# Altium PCB Joystick.PcbDoc
Units mm, origin at the board's own origin, x right, y up, seen from the top; angles counter-clockwise.
Board outline 315.73 x 101.6 mm, 2 copper layers (Top Layer, Bottom Layer); 88 components, 64 nets, 385 pads, 135 vias.
Unrouted connection lines stored in the file: 2.
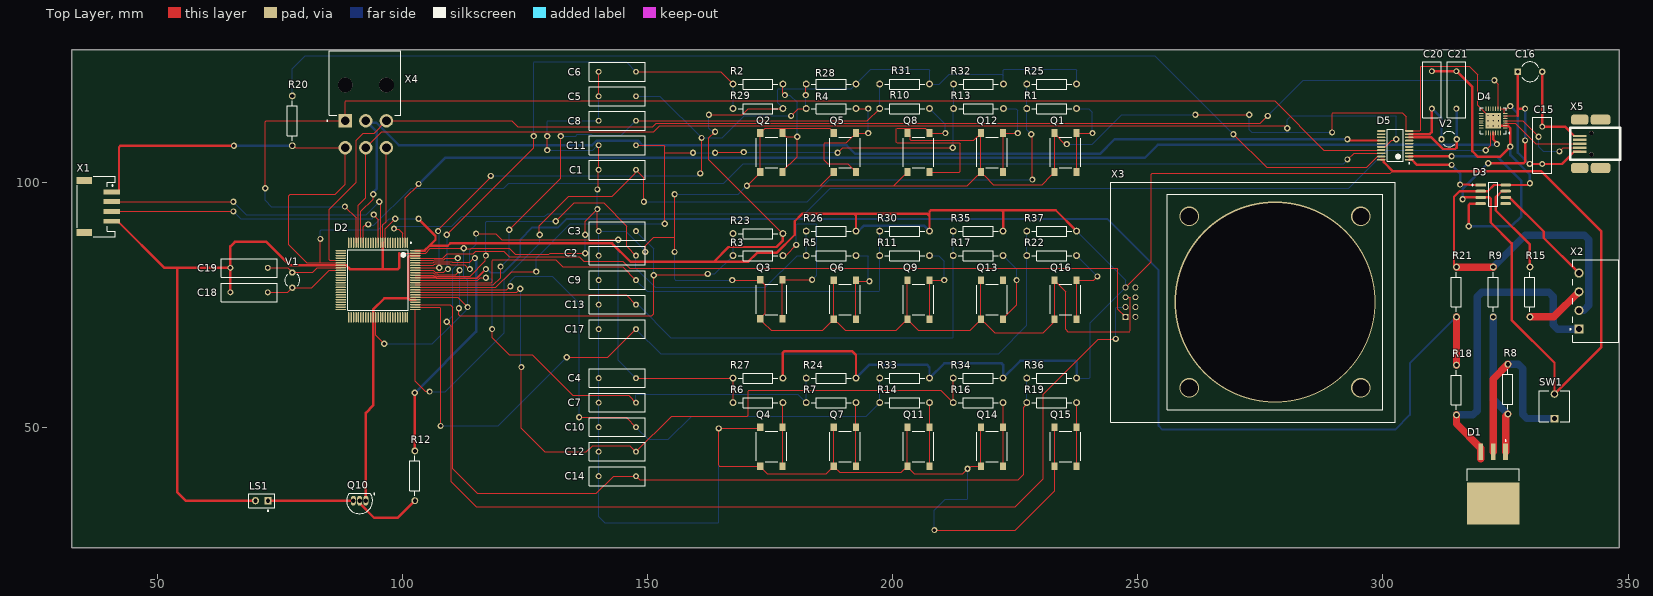
[diagram p0: Top Layer view]
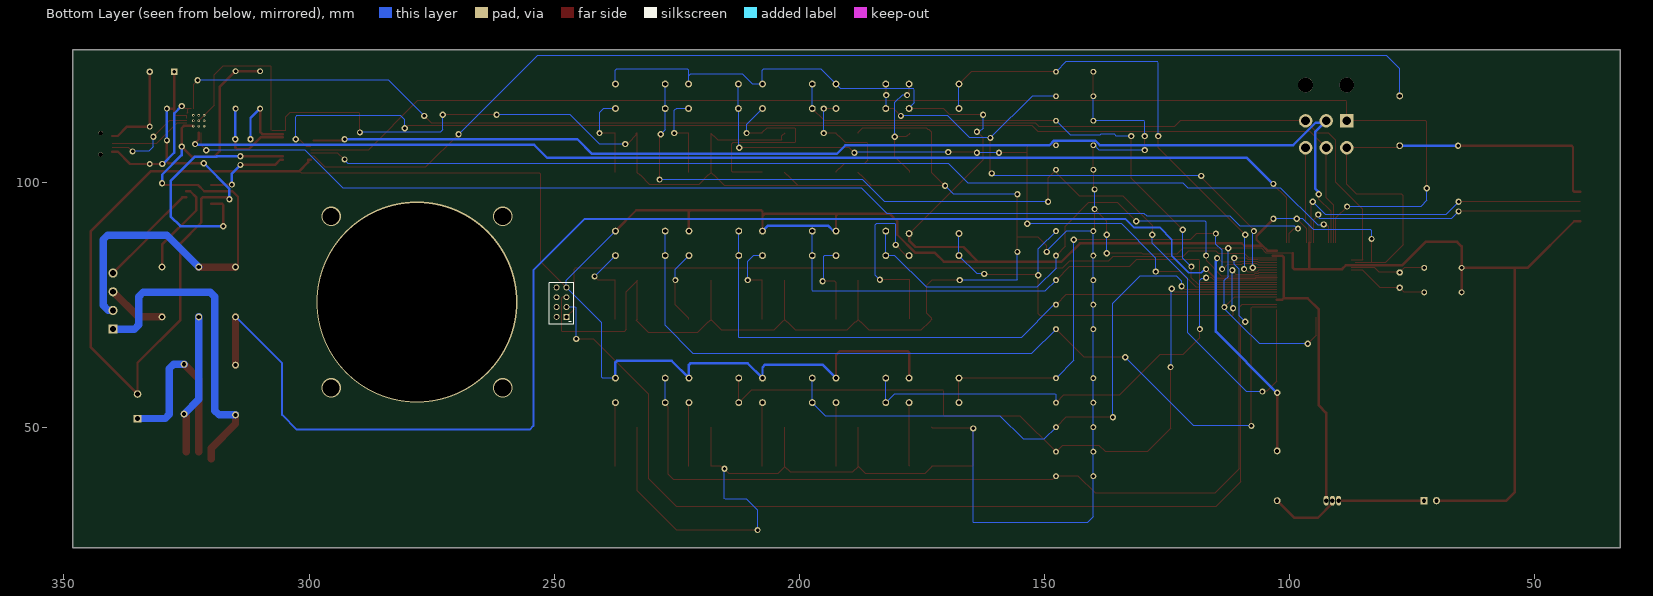
[diagram p1: Bottom Layer view, seen from below]

## Layer stack, top to bottom
Top Solder: solder mask 0.0102, Solder Resist, Dk 3.5
Top Layer: signal copper 0.0356
Dielectric 1: dielectric 0.32, FR-4, Dk 4.8
Bottom Layer: signal copper 0.0356
Bottom Solder: solder mask 0.0102, Solder Resist, Dk 3.5

## Board outline
32.5,25.4 348.234,25.4 348.234,127 32.5,127

## Design rules (kind name [scope] priority, off if disabled: settings)
Clearance [All] p1: gap=0.254 ignorepadtopadclearanceinfootprint=FALSE except(0: Arc-Hole Track-Hole SMDPad-Hole THPad-Hole Via-Hole Fill-Hole Poly-Hole Region-Hole Text-Hole; 0.1: Arc-Arc Arc-Track Arc-SMDPad Arc-THPad Arc-Via Track-Track Track-SMDPad Track-THPad Track-Via SMDPad-SMDPad SMDPad-THPad SMDPad-Via)
PolygonConnect [All] p1: connectstyle=Relief reliefconductorwidth=0.254 reliefentries=4 polygonreliefangle="90 Angle" airgapwidth=0.254
RoutingVias [All] p1: holewidth=0.711 width=1.27 viastyle="Through Hole" minholewidth=0.711 minwidth=1.27 maxholewidth=0.711 maxwidth=1.27
SolderMaskExpansion [All] p1: expansion=0.102 istentingtop=FALSE
Width [All] p1: maxlimit=1.6 minlimit=0.1 preferedwidth=0.254 minimp=50.000000 maximp=50.000000 favimp=50.000000
30 further rules are at their usual default settings.

## Components (designator, comment, footprint, x,y, rotation, side; value= is the part's Value field where it differs from the comment)
C1 "Cap" RAD-0.3 143.81,102.5 r0 top value=100uF
C2 "Cap" RAD-0.3 143.81,85 r0 top value=100uF
C3 "Cap" RAD-0.3 143.81,90 r0 top value=100uF
C4 "Cap" RAD-0.3 143.81,60 r0 top value=100uF
C5 "Cap" RAD-0.3 143.81,117.5 r0 top value=100uF
C6 "Cap" RAD-0.3 143.81,122.5 r0 top value=100uF
C7 "Cap" RAD-0.3 143.81,55 r0 top value=100uF
C8 "Cap" RAD-0.3 143.81,112.5 r0 top value=100uF
C9 "Cap" RAD-0.3 143.81,80 r180 top value=100uF
C10 "Cap" RAD-0.3 143.81,50 r180 top value=100uF
C11 "Cap" RAD-0.3 143.81,107.5 r0 top value=100uF
C12 "Cap" RAD-0.3 143.81,45 r0 top value=100uF
C13 "Cap" RAD-0.3 143.81,75 r0 top value=100uF
C14 "Cap" RAD-0.3 143.81,40 r0 top value=100uF
C15 "Cap" RAD-0.3 332.5,107.5 r90 top value=1uF
C16 "Cap2" CAPR5-4X5 330,122.5 r0 top value=4.7uF
C17 "Cap" RAD-0.3 143.81,70 r0 top value=100uF
C18 "Cap" RAD-0.3 68.69,77.5 r180 top value=22pF
C19 "Cap" RAD-0.3 68.69,82.5 r0 top value=22pF
C20 "Cap" RAD-0.3 310,118.81 r270 top value=22pF
C21 "Cap" RAD-0.3 315,118.81 r270 top value=22pF
D1 "TL783CKTTR" FP-KTT0003A-MFG 322.5,36.697 r180 top
D2 "ATmega640-16AU" 100A_M 95,80 r270 top
D3 "TJA1050T/CM,118" FP-SOT96-1-IPC_A 322.5,97.5 r0 top
D4 "CP2103-GM" SLAB-QFN-28-3125x3125TP_A_M 322.5,112.5 r180 top
D5 "MCP2515-I/ST" TSSOP-ST20_N 302.5,107.5 r180 top
LS1 "Speaker" PIN2 72.54,35 r180 top
Q1 "430152043836" WS-TASV_L6W6H4.3_4301x20438x6 235.25,106.025 r90 top
Q2 "430152043836" WS-TASV_L6W6H4.3_4301x20438x6 175.25,106.025 r90 top
Q3 "430152043836" WS-TASV_L6W6H4.3_4301x20438x6 175.25,76.073 r90 top
Q4 "430152043836" WS-TASV_L6W6H4.3_4301x20438x6 175.25,46.025 r90 top
Q5 "430152043836" WS-TASV_L6W6H4.3_4301x20438x6 190.25,106.025 r90 top
Q6 "430152043836" WS-TASV_L6W6H4.3_4301x20438x6 190.25,76.025 r90 top
Q7 "430152043836" WS-TASV_L6W6H4.3_4301x20438x6 190.25,46.025 r90 top
Q8 "430152043836" WS-TASV_L6W6H4.3_4301x20438x6 205.25,106.025 r90 top
Q9 "430152043836" WS-TASV_L6W6H4.3_4301x20438x6 205.25,76.025 r90 top
Q10 "NPN" TO-226-AA 91.23,35 r90 top
Q11 "430152043836" WS-TASV_L6W6H4.3_4301x20438x6 205.25,46.025 r90 top
Q12 "430152043836" WS-TASV_L6W6H4.3_4301x20438x6 220.25,106.025 r90 top
Q13 "430152043836" WS-TASV_L6W6H4.3_4301x20438x6 220.25,76.025 r90 top
Q14 "430152043836" WS-TASV_L6W6H4.3_4301x20438x6 220.25,46.025 r90 top
Q15 "430152043836" WS-TASV_L6W6H4.3_4301x20438x6 235.25,46.025 r90 top
Q16 "430152043836" WS-TASV_L6W6H4.3_4301x20438x6 235.25,76.025 r90 top
R1 "Res2" AXIAL-0.4 232.42,115 r180 top value=5K
R2 "Res2" AXIAL-0.4 172.5,120 r180 top value=5K
R3 "Res2" AXIAL-0.4 172.5,85 r180 top value=5K
R4 "Res2" AXIAL-0.4 187.42,115 r180 top value=5K
R5 "Res2" AXIAL-0.4 187.42,85 r180 top value=5K
R6 "Res2" AXIAL-0.4 172.5,55 r180 top value=5K
R7 "Res2" AXIAL-0.4 187.42,55 r180 top value=5K
R8 "Res2" AXIAL-0.4 325.5,57.75 r270 top value=75
R9 "Res2" AXIAL-0.4 322.5,77.58 r90 top value=220
R10 "Res2" AXIAL-0.4 202.42,115 r180 top value=5K
R11 "Res2" AXIAL-0.4 202.42,85 r180 top value=5K
R12 "Res2" AXIAL-0.4 102.5,40.08 r270 top value=10K
R13 "Res2" AXIAL-0.4 217.5,115 r0 top value=5K
R14 "Res2" AXIAL-0.4 202.42,55 r0 top value=5K
R15 "Res2" AXIAL-0.4 330,77.58 r270 top value=120
R16 "Res2" AXIAL-0.4 217.42,55 r180 top value=5K
R17 "Res2" AXIAL-0.4 217.42,85 r180 top value=5K
R18 "Res2" AXIAL-0.4 315,57.58 r270 top value=10K
R19 "Res2" AXIAL-0.4 232.42,55 r0 top value=5K
R20 "Res2" AXIAL-0.4 77.5,112.5 r90 top value=10K
R21 "Res2" AXIAL-0.4 315,77.58 r270 top value=1K
R22 "Res2" AXIAL-0.4 232.42,85 r0 top value=5K
R23 "Res2" AXIAL-0.4 172.5,89.5 r180 top value=5K
R24 "Res2" AXIAL-0.4 187.42,60 r180 top value=5K
R25 "Res2" AXIAL-0.4 232.42,120 r180 top value=5K
R26 "Res2" AXIAL-0.4 187.42,90 r180 top value=5K
R27 "Res2" AXIAL-0.4 172.5,60 r180 top value=5K
R28 "Res2" AXIAL-0.4 187.42,120 r180 top value=5K
R29 "Res2" AXIAL-0.4 172.5,115 r180 top value=5K
R30 "Res2" AXIAL-0.4 202.42,90 r180 top value=5K
R31 "Res2" AXIAL-0.4 202.42,120 r180 top value=5K
R32 "Res2" AXIAL-0.4 217.5,120 r0 top value=5K
R33 "Res2" AXIAL-0.4 202.42,60 r0 top value=5K
R34 "Res2" AXIAL-0.4 217.42,60 r180 top value=5K
R35 "Res2" AXIAL-0.4 217.42,90 r180 top value=5K
R36 "Res2" AXIAL-0.4 232.42,60 r0 top value=5K
R37 "Res2" AXIAL-0.4 232.42,90 r0 top value=5K
SW1 "EVQ-22707K" FP-EVQ-22707K-MFG 335,54.25 r90 top
V1 "XTAL" R38 77.5,80 r180 top
V2 "XTAL" R38 313.5,108.75 r90 top
X1 "620104131822" 620104131822 37.5,95 r270 top
X2 "1803293" FP-1803293-MFG 343.4,75.715 r90 top
X3 "MLX90333_JoysticPlate" MLX90333_Joy 278,75.5 r180 top
X4 "39-30-1061" FP-39-30-1061-MFG 92.5,120 r180 top
X5 "67503-1020" MOLX-67503-1020_V 340.175,106.2 r180 top

## Footprints (in the part's own frame and the unit in brackets; to place one, negate y for a bottom-side part, rotate by r counter-clockwise, add the part's x,y. Pads: shape width x height; smd on the part's side, far side on the other; paste and mask are expansions set on the pad)
100A_M [mm] "Thin QFP, 100-Leads, Body 14x14mm, Pitch 0.5mm, IPC Low Density"
  oval 2.1x0.3 smd: 1(-7.6,6) 2(-7.6,5.5) 3(-7.6,5) 4(-7.6,4.5) 5(-7.6,4) 6(-7.6,3.5) 7(-7.6,3) 8(-7.6,2.5) 9(-7.6,2) 10(-7.6,1.5) 11(-7.6,1) 12(-7.6,0.5) 13(-7.6,0) 14(-7.6,-0.5) 15(-7.6,-1) 16(-7.6,-1.5) 17(-7.6,-2) 18(-7.6,-2.5) 19(-7.6,-3) 20(-7.6,-3.5) 21(-7.6,-4) 22(-7.6,-4.5) 23(-7.6,-5) 24(-7.6,-5.5) 25(-7.6,-6) 51(7.6,-6) 52(7.6,-5.5) 53(7.6,-5) 54(7.6,-4.5) 55(7.6,-4) 56(7.6,-3.5) 57(7.6,-3) 58(7.6,-2.5) 59(7.6,-2) 60(7.6,-1.5) 61(7.6,-1) 62(7.6,-0.5) 63(7.6,0) 64(7.6,0.5) 65(7.6,1) 66(7.6,1.5) 67(7.6,2) 68(7.6,2.5) 69(7.6,3) 70(7.6,3.5) 71(7.6,4) 72(7.6,4.5) 73(7.6,5) 74(7.6,5.5) 75(7.6,6)
  oval 0.3x2.1 smd: 26(-6,-7.6) 27(-5.5,-7.6) 28(-5,-7.6) 29(-4.5,-7.6) 30(-4,-7.6) 31(-3.5,-7.6) 32(-3,-7.6) 33(-2.5,-7.6) 34(-2,-7.6) 35(-1.5,-7.6) 36(-1,-7.6) 37(-0.5,-7.6) 38(0,-7.6) 39(0.5,-7.6) 40(1,-7.6) 41(1.5,-7.6) 42(2,-7.6) 43(2.5,-7.6) 44(3,-7.6) 45(3.5,-7.6) 46(4,-7.6) 47(4.5,-7.6) 48(5,-7.6) 49(5.5,-7.6) 50(6,-7.6) 76(6,7.6) 77(5.5,7.6) 78(5,7.6) 79(4.5,7.6) 80(4,7.6) 81(3.5,7.6) 82(3,7.6) 83(2.5,7.6) 84(2,7.6) 85(1.5,7.6) 86(1,7.6) 87(0.5,7.6) 88(0,7.6) 89(-0.5,7.6) 90(-1,7.6) 91(-1.5,7.6) 92(-2,7.6) 93(-2.5,7.6) 94(-3,7.6) 95(-3.5,7.6) 96(-4,7.6) 97(-4.5,7.6) 98(-5,7.6) 99(-5.5,7.6) 100(-6,7.6)
  silkscreen extent -7.72,-6.15 6.15,6.83, body extent -7,-7 7,7, height 1.6
620104131822 [mm] "2.00mm SMT Male Horizontal Shrouded Header, 4p"
  rect 1x3.4 smd: 1(-3,3.2) 2(-1,3.2) 3(1,3.2) 4(3,3.2)
  rect 1.4x3.1 smd: MP1(-5.3,-2.45) MP2(5.3,-2.45)
  silkscreen extent -6.15,-3.9 6.15,3.9, body extent -6,-3.8 6,4.8, height 5.57
AXIAL-0.4 [mm] "Axial Device, Thru-Hole; 2 Leads; 0.4 in Pin Spacing"
  round 1.4 hole 0.85: 1(-5.08,0) 2(5.08,0)
  silkscreen extent -4.06,-1.02 4.06,1.02
CAPR5-4X5 [mm] "Capacitor; 2 Leads"
  rect 1.35x1.35 hole 0.8: 1(-2.5,0)
  round 1.35 hole 0.8: 2(2.5,0)
  silkscreen extent -1.69,-2 1.82,2
FP-39-30-1061-MFG [mm]
  rect 2.75x2.75 hole 1.8 paste-1000 mask+0: 1(4.2,7.5)
  round 2.75 hole 1.8 paste-1000 mask+0: 2(0,7.5) 3(-4.2,7.5) 4(4.2,13) 5(0,13) 6(-4.2,13)
  round 3 hole 3 unplated paste-1000 mask+0: ""(-4.2,0.2) ""(4.2,0.2)
  silkscreen extent -7.09,-6.78 7.99,7.62, body extent -7.19,-6.88 7.59,14.48, height 0.25
FP-1803293-MFG [mm]
  rect 1.85x1.85 hole 1.2 paste-1000 mask+0: 1(-5.715,3.4)
  round 1.85 hole 1.2 paste-1000 mask+0: 2(-1.905,3.4) 3(1.905,3.4) 4(5.715,3.4)
  silkscreen extent -8.39,-4.67 8.39,5.27, body extent -8.49,-4.77 8.49,4.77, height 0.25
FP-EVQ-22707K-MFG [mm]
  rect 1.55x1.55 hole 1 paste-1000 mask+0: A(-2.5,0)
  round 1.55 hole 1 paste-1000 mask+0: B(2.5,0)
  silkscreen extent -3.15,-3.15 3.15,3.15, body extent -3.37,-3.25 3.37,3.25, height 0.25
FP-KTT0003A-MFG [mm]
  rect 1x3.4 smd paste-1000 mask+0: 1(-2.54,-8.303) 2(0,-8.303) 3(2.54,-8.303)
  rect 10.7x8.6 smd paste-1000 mask+0: 4(0,2.298)
  silkscreen extent -5.34,-10.69 5.34,-2.38, body extent -5.45,-10.1 5.45,6.7, height 0.25
FP-SOT96-1-IPC_A [mm]
  rect 2.204x0.608 smd paste+0 mask+0: 1(-2.551,1.905)
  rrect100% 2.204x0.608 smd paste+0 mask+0: 2(-2.551,0.635) 3(-2.551,-0.635) 4(-2.551,-1.905) 5(2.551,-1.905) 6(2.551,-0.635) 7(2.551,0.635) 8(2.551,1.905)
  silkscreen extent -4.33,-2.45 0.95,2.45, body extent -4.15,-2.95 4.15,2.95, height 0.25
MLX90333_Joy [mm]
  rect 1.2x1.2 hole 0.8: 1(30.5,3)
  round 1.2 hole 0.8: 2(28.5,3) 3(30.5,1) 4(28.5,1) 5(30.5,-1) 6(28.5,-1) 7(30.5,-3) 8(28.5,-3)
  silkscreen extent -24.5,-24.5 33.5,24.5
MOLX-67503-1020_V [mm] "Mini USB Connector, SMT, Righer Angle"
  rrect50% 2.8x0.5 smd: 1(0,0) 2(0,-0.8) 3(0,-1.6) 4(0,-2.4) 5(0,-3.2)
  rrect50% 3.5x2.05 smd: 6(0.025,3.325) 8(0.025,-6.525)
  rrect50% 4x2.05 smd: 7(-4.225,3.325) 9(-4.225,-6.525)
  round 0.9 hole 0.9 unplated: X(-2.325,-3.8) Y(-2.325,0.6)
  silkscreen extent -8.25,-4.85 2,1.65, body extent -8.22,-6.56 0.78,3.34, height 3.95
PIN2 [mm] "Photosensitive Diode; 2 Leads"
  rect 1.5x1.5 hole 0.9: 1(0,0)
  round 1.5 hole 0.9: 2(2.54,0)
  silkscreen extent -1.4,-1.4 3.94,2.17
R38 [mm] "Crystal, Thru-Hole; 2 Leads; Body 3.1 x 8.2 mm (Dia.xH)"
  round 1.3 hole 0.7: 1(0,1.55) 2(0,-1.55)
  silkscreen extent -1.55,-1.19 1.55,1.17
RAD-0.3 [mm] "Radial Cap, Thru-Hole; 2 Leads; 0.3 in Pin Spacing"
  round 1.2 hole 0.7: 1(-3.81,0) 2(3.81,0)
  silkscreen extent -5.71,-1.91 5.71,1.91
SLAB-QFN-28-3125x3125TP_A_M [mm] "QFN, 28-Leads, Body 5x5mm, Pitch 0.5mm, Thermal Pad 3.13x3.13mm, IPC Low Density"
  oval 0.95x0.2 smd: 1(-2.475,1.5) 2(-2.475,1) 3(-2.475,0.5) 4(-2.475,0) 5(-2.475,-0.5) 6(-2.475,-1) 7(-2.475,-1.5) 15(2.475,-1.5) 16(2.475,-1) 17(2.475,-0.5) 18(2.475,0) 19(2.475,0.5) 20(2.475,1) 21(2.475,1.5)
  oval 0.2x0.95 smd: 8(-1.5,-2.475) 9(-1,-2.475) 10(-0.5,-2.475) 11(0,-2.475) 12(0.5,-2.475) 13(1,-2.475) 14(1.5,-2.475) 22(1.5,2.475) 23(1,2.475) 24(0.5,2.475) 25(0,2.475) 26(-0.5,2.475) 27(-1,2.475) 28(-1.5,2.475)
  rect 3.13x3.13 smd: 29(0,0)
  silkscreen extent -3.42,-2.65 2.65,2.65, body extent -2.5,-2.5 2.5,2.5, height 1
TO-226-AA [mm] "TO, Flat Index; 3 In-Line, Axial Leads; Body Dia. 4.8mm; Leads 0.55 x 0.51 mm (max)"
  oval 2x1 hole 0.9: 1(0,-1.27) 2(0,0) 3(0,1.27)
  silkscreen extent -2.65,-3.13 1.52,2.65, body extent -2.65,-2.66 1.52,2.66, height 5.33
TSSOP-ST20_N [mm] "TSOP, 20-Leads, Body 6.5x4.4mm, Pitch 0.65mm, IPC Medium Density"
  oval 1.7x0.35 smd: 1(-2.85,2.925) 2(-2.85,2.275) 3(-2.85,1.625) 4(-2.85,0.975) 5(-2.85,0.325) 6(-2.85,-0.325) 7(-2.85,-0.975) 8(-2.85,-1.625) 9(-2.85,-2.275) 10(-2.85,-2.925) 11(2.85,-2.925) 12(2.85,-2.275) 13(2.85,-1.625) 14(2.85,-0.975) 15(2.85,-0.325) 16(2.85,0.325) 17(2.85,0.975) 18(2.85,1.625) 19(2.85,2.275) 20(2.85,2.925)
  silkscreen extent -2.98,-3.3 1.6,3.77, body extent -2.25,-3.3 2.25,3.3, height 1.2
WS-TASV_L6W6H4.3_4301x20438x6 [mm] "SMD Tact Switch, body 6x6mm"
  rect 1.55x1.3 smd: A1(-3.975,2.25) A2(3.975,2.25) B1(-3.975,-2.25) B2(3.975,-2.25)
  silkscreen extent -3.1,-3.1 3.1,3.1, body extent -4.5,-3.1 4.5,3.1, height 4.3

## Part data
C1 C2 C3 C4 C5 C6 C7 C8 C9 C10 C11 C12 C13 C14 C15 C16 C17 C18 C19 C20 C21: "Capacitor", Publisher="Altium Limited"
  C1 C2 C3 C4 C5 C6 C7 C8 C9 C10 C11 C12 C13 C14 C15 C17 C18 C19 C20 C21: LatestRevisionDate=17-Jul-2002, LatestRevisionNote="Re-released for DXP Platform.", PackageDescription="Radial Cap, Thru-Hole; 2 Leads; 0.3 in Pin Spacing", PackageReference=RAD-0.3, Published=8-Jun-2000
  C16: PackageDescription="Capacitor; 2 Leads", PackageReference=CAPR5-4X5, Published=23-Sep-2002
D1: library part CMP-04917-000064-1, "IC REG LIN POS ADJ 700MA DDPAK", Case/Package=TO-263, Dropout Voltage=10V, Max Input Voltage=150V, Max Operating Temperature=125°C, Max Output Current=700mA, Max Output Voltage=125V, Min Input Voltage=21.5V, Min Operating Temperature=0°C, Min Output Voltage=1.25V, Package Quantity=1, Power Supply Rejection Ratio (PSRR)=76dB, Quiescent Current=15mA, Reference Voltage=1.3V, Height=4.44mm, Lead Free="Lead Free", Length=10.18mm, Min Current Limit=700mA, Mount="Surface Mount", Number of Outputs=1, Number of Pins=3, Number of Regulators=1, Output Current=700mA, Output Type=Adjustable, Output Voltage=125V, Packaging="Tape and Reel", Polarity=Positive, Radiation Hardening=No, REACH SVHC="No SVHC", Weight=0.050897oz, Width=8.41mm
D2: library part CMP-0095-00194-2, "8-bit AVR Microcontroller, 2.7-5.5V, 8MHz, 64KB Flash, 4KB EEPROM, 8KB SRAM, 86 GPIO pins, 100-pin TQFP, Industrial Grade (-40°C to 85°C), Pb-Free", Code_JEDEC=MS-026-AED, ComponentLink1Description="Manufacturer URL", ComponentLink1URL=http://www.atmel.com/, ComponentLink2Description="ATmega640/1280/1281/2560/2561 Datasheet", ComponentLink2URL=http://www.atmel.com/dyn/resources/prod_documents/doc2549.pdf, ComponentLink3Description="ATmega640/1280/1281/2560/2561 Summary", ComponentLink3URL=http://www.atmel.com/dyn/resources/prod_documents/2549S.pdf, DatasheetVersion="revN, May-2011", PackageDescription="100-Pin Thin Profile Plastic Quad Flat Pack (TQFP), 14 x 14 x 1.0 mm Body, 0.5 mm Pitch", PackageReference=100A, PackageVersion="revD, Oct-2010", RevisionNote="DatasheetVersion & PackageVersion updated. URLs added."
D3: library part CMP-2000-04923-2, "IC TRANSCEIVER HALF 1/1 8SO", Case/Package=SO, Max Operating Temperature=150°C, Max Supply Current=10mA, Max Supply Voltage=5.25V, Min Operating Temperature=-40°C, Min Supply Voltage=4.75V, Package Quantity=2500, Contact Plating=Gold, Data Rate=1Mbps, Interface=CAN, Lead Free="Lead Free", Mount="Surface Mount", Nominal Supply Current=10mA, Number of Pins=8, Number of Receive Buffers=1, Number of Transceivers=1, Number of Transmit Buffers=1, Packaging="Tape and Reel", Radiation Hardening=No, REACH SVHC="No SVHC", Receiver Hysteresis=70mV, Simplex/Duplex="Half Duplex"
D4: library part CMP-0511-00006-1, "Single-Chip USB to UART Bridge, 1024 Bytes EEPROM, -40 to 85 degC, 28-pin QFN, Tube", Manufacturer="Silicon Labs", ComponentLink1Description="Manufacturer URL", ComponentLink1URL=http://www.silabs.com/, ComponentLink2Description=Datasheet, ComponentLink2URL=http://www.silabs.com/Support%20Documents/TechnicalDocs/CP2103.pdf, ComponentLink3Description="Package Specification", ComponentLink3URL=http://www.silabs.com/Support%20Documents/TechnicalDocs/C8051F35x.pdf, DatasheetVersion="Rev. 1.0", EEPROM="1024 Bytes", Internal Oscillator=TRUE, Mounting Technology="Surface Mount", PackageDescription="28-Pin Quad-Flat No-Leads Package, Body 5 x 5 mm, Pitch 0.5 mm", PackageReference=QFN-28, PartNumber=CP2103-GM, Sub-Family="USB Bridges"
D5: library part CMP-0186-00077-2, "Stand-Alone CAN Controller With SPI Interface, 20-Pin TSSOP, Industrial Temperature", Code_JEDEC=MO-153-AC, ComponentLink1Description="Manufacturer URL", ComponentLink1URL=http://www.microchip.com/, ComponentLink2Description=Datasheet, ComponentLink2URL=http://ww1.microchip.com/downloads/en/DeviceDoc/21801f.pdf, ComponentLink3Description="Package Specification", ComponentLink3URL=http://www.microchip.com/stellent/groups/techpub_sg/documents/packagingspec/en012702.pdf, DatasheetVersion="revF, Oct-2010", PackageDescription="20-Lead Plastic Thin Shrink Small Outline (ST) - 4.4mm Body [TSSOP]", PackageReference=TSSOP-ST20, PackageVersion="revBB, Aug-2009", RevisionNote="URLs added. DatasheetVersion updated."
LS1: "Loudspeaker", LatestRevisionDate=17-Jul-2002, LatestRevisionNote="Re-released for DXP Platform.", PackageReference=PIN2, Published=24-Mar-1999, Publisher="Altium Limited"
Q1 Q2 Q3 Q4 Q5 Q6 Q7 Q8 Q9 Q11 Q12 Q13 Q14 Q15 Q16: library part CMP-1452-00002-2, Color=Orange, Contact Current Rating=50mA, Insulation Resistance=100MΩ, Max Operating Temperature=85°C, Min Operating Temperature=-40°C, Voltage Rating=12V, Actuator Length=900µm, Actuator Material="Liquid Crystal Polymer, Polymer", Contact Material="Stainless Steel, Steel", Contact Plating=Silver, Current Rating=50mA, Diameter=3.5mm, Height=4.3mm, Illumination Type="Illuminated, Non-Illuminated", Length=6.2mm, Mechanical Life=200kcycles, Mount="Surface Mount", NexarPartId=22861785, Packaging="Tape and Reel", REACH SVHC="No SVHC", RoHS=Compliant, Switch Function=Off-Mom, Switch Travel=250µm, Termination="Gull Wing", Throw Configuration=SPST, Width=6.2mm
Q10: "NPN Bipolar Transistor", Code_JEDEC=TO-226-AA, LatestRevisionDate=17-Jul-2002, LatestRevisionNote="Re-released for DXP Platform.", PackageDescription="TO, Flat Index; 3 In-Line, Axial Leads; Body Dia. 4.8mm; Leads 0.55 x 0.51 mm (max)", PackageReference=TO-226-AA, Published=8-Jun-2000, Publisher="Altium Limited"
R1 R2 R3 R4 R5 R6 R7 R8 R9 R10 R11 R12 R13 R14 R15 R16 R17 R18 R19 R20 R21 R22 R23 R24 R25 R26 R27 R28 R29 R30 R31 R32 R33 R34 R35 R36 R37: "Resistor", LatestRevisionDate=17-Jul-2002, LatestRevisionNote="Re-released for DXP Platform.", PackageDescription="Axial Device, Thru-Hole; 2 Leads; 0.4 in Pin Spacing", PackageReference=AXIAL-0.4, Published=8-Jun-2000, Publisher="Altium Limited"
SW1: library part CMP-05618-000065-1, "SWITCH TACTILE SPST-NO 0.02A 15V", Actuator Color=Black, Case/Package=Radial, Contact Current Rating=20mA, Contact Resistance=50mR, Max Operating Temperature=70°C, Max Voltage Rating (DC)=15V, Min Operating Temperature=-20°C, Operating Force=2.6N, Package Quantity=1, Actuator Length=3.6mm, Actuator Type=Standard, Current Rating=20mA, Electrical Life=50000Cycles, Illumination Type=Non-Illuminated, Lead Free="Lead Free", Mechanical Life=50000Cycles, Mount="Through Hole", Orientation=Straight, Packaging="Tape and Reel", Radiation Hardening=No, RoHS Compliant=Yes, Series=EVQ2, Size=6mm, Switch Function=Off-Mom, Switch Travel=0.25mm, Termination="PC Pin", Throw Configuration=SPST, Voltage Rating (DC)=15V
V1 V2: "Crystal Oscillator", LatestRevisionDate=17-Jul-2002, LatestRevisionNote="Re-released for DXP Platform.", PackageDescription="Crystal, Thru-Hole; 2 Leads; Body 3.1 x 8.2 mm (Dia.xH)", PackageReference=R38, Published=8-Jun-2000, Publisher="Altium Limited"
X1: library part CMP-1502-00671-2, Color="Beige, White", Contact Resistance=20mΩ, Current Rating=2A, Flammability Rating="UL94 V-0", Insulation Resistance=1GΩ, Max Operating Temperature=85°C, Min Operating Temperature=-40°C, Operating Supply Voltage=100V, Voltage Rating=125V, Connector Type="Male Pin", Contact Gender=Male, Contact Material=Copper, Contact Mating Length=3.683mm, Contact Plating=Tin, Gender=Male, Height=5.6mm, Housing Material=Nylon, Insulation=Insulated, Lead Free="Lead Free", Lead Pitch=2mm, Length=12mm, Mount="Surface Mount", NexarPartId=18818240, Number of Contacts=4, Number of Pins=4, Number of Positions=4, Number of Rows=1, Packaging="Tape and Reel", Pitch=2mm, REACH SVHC=Unknown, RoHS=Compliant, Termination=SMD/SMT, Width=12mm
X2: library part CMP-09399-000011-1, "TERM BLOCK HDR 4POS 90DEG 3.81MM", Color=Green, Current=8A, Flammability Rating="UL94 V-0", Package Quantity=50, Test Voltage=2.5kV, Voltage=300V, Voltage Rating=160V, Voltage Rating (DC)=640mV, Approvals=UL, Connector Type=PCB, Contact Gender=Male, Contact Plating=Tin, Current Rating=8A, Depth=9.2mm, Housing Color=Green, Housing Material=Polybutylene, Lead Free="Lead Free", Length=16.63mm, Max Current Rating=8A, Mount="Through Hole", Number of Contacts=4, Number of Levels=1, Number of Poles=4, Number of Positions=4, Number of Positions Per Level=4, Number of Rows=1, Orientation="Right Angle", Packaging=Bulk, Pitch=3.81mm, Series=MC, Termination=Solder, Weight=4oz, Width=18.7mm
X4: library part CMP-00257-00276738-1, "39-30-1061 Connector Wire to Board Header 6 Position 4.2mm Solder Right Angle Thru-Hole Tray", Color=Natural, Contact Resistance=10mΩ, Current Rating=8A, Flammability Rating="UL94 V-2", Insulation Resistance=1GΩ, Max Current Rating=5A, Max Operating Temperature=105°C, Min Operating Temperature=-40°C, Voltage Rating=600V, Contact Gender=Male, Contact Material="Brass, Gold", Contact Plating=Gold, Depth=19.4mm, ELV=Compliant, Gender=Male, Glow Wire Compliant=Non-compliant, Halogen Free="Low Halogen", Height=5.57mm, Housing Color=Natural, Housing Material=Nylon, Lead Free="Lead Free", Lead Pitch=4.2mm, Length=13.8mm, Material=Brass, Mount="Surface Mount, Through Hole", NexarPartId=276738, Number of Circuits=6, Number of Contacts=6, Number of Ports=1, Number of Positions=6, Number of Rows=2, Number of Terminals=6, Orientation="Right Angle", Packaging=Bulk, Pitch=4.2mm, Radiation Hardening=No, REACH SVHC=Unknown, RoHS=Compliant, Row Spacing=4.2mm, Schedule B=8536694040, Termination=Solder, Voltage Rating (DC)=600V
X5: library part CMP-0411-00002-1, "USB, MINI, SMD, RA KME04-USBMU03A01", Manufacturer=Molex, ComponentLink1Description="Manufacturer URL", ComponentLink1URL=http://www.molex.com/, ComponentLink2Description=Datasheet, ComponentLink2URL=http://www.molex.com/pdm_docs/sd/675031020_sd.pdf, DatasheetVersion="Rev F, 06/2009", Mounting Technology="Surface Mount", PackageDescription="Mini USB Connector, SMT, Righer Angle", PackageReference=67503-1020, PartNumber=67503-1020, Terminal Pitch="0.8 mm"

## Via types
v1: diameter 1.27, hole 0.711, Top Layer to Bottom Layer, 121 vias
v2: diameter 0.5, hole 0.2, Top Layer to Bottom Layer, 9 vias
v3: diameter 4, hole 3.5, Top Layer to Bottom Layer, 4 vias
v4: diameter 41, hole 40.5, Top Layer to Bottom Layer, 1 vias

## Nets (pads, with @x,y where several pads share a name; then routed paths per layer and width w, separated by ;. In a path a pad name is that pad's centre, name@x,y a point inside that pad or via, vN(x,y) a via of type N, cw(c..) or ccw(c..) an arc to the next point about the centre after c; other vN are vias at no path point)
GND: C1.1 C2.1 C3.1 C4.1 C5.1 C6.1 C7.1 C8.1 C9.2 C10.2 C11.1 C12.1 C13.1 C14.1 C17.1 C18.2 C19.1 C20.1 C21.1 D2.11 D2.32 D2.62 D2.81 D2.99 D3.2 D3.8 D4.2 D4.29 D5.10 LS1.2 Q1.A1 Q1.A2 Q2.A1 Q2.A2 Q3.A1 Q3.A2 Q4.A1 Q4.A2 Q5.A1 Q5.A2 Q6.A1 Q6.A2 Q7.A1 Q7.A2 Q8.A1 Q8.A2 Q9.A1 Q9.A2 Q11.A1 Q11.A2 Q12.A1 Q12.A2 Q13.A1 Q13.A2 Q14.A1 Q14.A2 Q15.A1 Q15.A2 Q16.A1 Q16.A2 R9.2 R21.1 X1.4 X2.2 X3.5 X4.6 | length 1180.9
  Top Layer w0.254: D2.62 94.5,68.75 v1(96.25,67) ; D2.11 96,91.25 96.7,91.95 X4.6 ; 99.35,85.5 103.512,85.5 103.535,85.523 104.698,85.523 105.675,86.5 v1(112.5,86.5) 112.632,86.368 113.893,86.368 114.048,86.523 121.727,86.523 123,85.25 129.863,85.25 130.113,85.5 v1(137.25,85.5) ; D2.81 111.25,76.5 v1(113.25,74.5) ; v1(129.5,106.515) v1(129.5,109.388) ; v1(137.25,89.25) 137.25,92 v1(139.75,94.5) 139.75,90.622 139.819,90.553 139.819,90.181 C3.1 ; v1(139.75,98.5) 139.875,98.625 139.875,102.375 C1.1 C11.1 ; C5.1 C6.1 ; v1(149.5,85.75) 149.5,87 151.25,88.75 155.5,88.75 ; v1(155.5,85.75) 155.5,87.75 155.5,88.75 ; v1(155.5,97.5) 155.5,88.75 ; v1(167.25,80) 172.952,80 172.952,79.971 174,78.923 174,73.223 173,72.223 173,71.973 173.523,71.45 175.223,69.75 185.7,69.75 187.352,71.402 187.477,71.402 Q6.A1@188,71.925 ; v1(170.25,99.25) v1@170.325,99.25 ; Q4.A2 172.75,49.75 v1(164.5,49.75) 164.5,42.199 164.649,42.05 Q4.A1 173,41.925 174.425,40.5 186.45,40.5 Q7.A1 ; Q7.A2 Q7.A1 ; Q6.A2 Q6.A1 Q6.A1@188,71.925 ; Q5.A1 188,101.925 187.477,101.402 187.352,101.402 185.2,99.25 ; Q5.A2 188,110.125 187.123,111.002 174.002,111.002 173.648,110.648 173.523,110.648 173,110.125 Q2.A2 Q2.A1 173,101.925 v1@170.325,99.25 ; Q11.A2 Q11.A1 ; Q9.A2 Q9.A1 Q9.A1@203,71.925 ; Q8.A1 203,101.925 202.477,101.402 202.352,101.402 200.2,99.25 ; Q8.A2 203.523,109.477 203.523,108.649 203.672,108.5 216.5,108.5 217.352,109.352 217.477,109.352 Q12.A2@218,109.875 ; v1(208.5,29) 225,29 233,37 Q15.A1 Q15.A2 ; Q14.A2 Q14.A1 217.95,42 216.025,42 215.525,41.5 v1(215.25,41.5) 214.25,40.5 204.425,40.5 Q11.A1@203,41.925 ; Q13.A2 Q13.A1 218,71.925 Q13.A1@218.261,71.663 ; Q12.A2 Q12.A2@218,109.875 ; Q16.A2 Q16.A2@233,79.875 ; v1(235.5,107.75) 235.306,107.944 234.931,107.944 233.25,109.625 233.25,110 Q1.A2 Q1.A1 233,101.925 232.477,101.402 232.352,101.402 230.45,99.5 220.55,99.5 218.648,101.402 218.523,101.402 Q12.A1@218,101.925 ; X3.5 248.351,76.5 248.5,76.351 248.5,69.649 248.351,69.5 235.75,69.5 235.25,70 235.25,77.625 Q16.A2@233,79.875 ; v1(261.75,113.75) v1(272.75,113.75) ; v1(289.638,110.138) 289.638,113.963 289.787,114.112 303.989,114.112 304.802,113.299 304.802,110.469 304.846,110.425 D5.10 307.526,110.425 307.675,110.574 307.675,123.526 307.824,123.675 317.575,123.675 319.318,121.932 319.318,115.682 v2(321.4,113.6) v2(322.5,112.5) ; v1@170.325,99.25 185.2,99.25 ; 185.2,99.25 200.2,99.25 ; Q7.A1 188,41.925 189.175,40.75 201.7,40.75 202.352,41.402 202.477,41.402 Q11.A1@203,41.925 ; Q6.A1@188,71.925 188.523,71.402 188.648,71.402 190.3,69.75 200.7,69.75 202.352,71.402 202.477,71.402 Q9.A1@203,71.925 ; 200.2,99.25 215.2,99.25 217.352,101.402 217.477,101.402 Q12.A1@218,101.925 ; Q11.A1@203,41.925 Q11.A1 ; Q11.A1@203,41.925 Q11.A1 ; Q9.A1@203,71.925 203.523,71.402 205.175,69.75 215.825,69.75 217.738,71.663 Q13.A1@218.261,71.663 ; Q12.A1@218,101.925 Q12.A1 Q12.A2@218,109.875 ; Q13.A1@218.261,71.663 218.523,71.402 218.648,71.402 220.8,69.25 224.162,69.25 230.7,69.25 233.25,71.8 Q16.A1 Q16.A2@233,79.875
  Top Layer w0.5: X1.4 41.9,92 51.4,82.5 54.293,82.5 ; C18.2 C19.1 ; LS1.2 55.75,35 54,36.75 54,82.207 54.293,82.5 ; D2.11 96,82.25 ; 99.35,85.5 99.35,82.543 99.057,82.25 96,82.25 ; C20.1 C21.1 318.25,119.37 318.25,106.293 319.416,105.127 323.877,105.127 v1(326,107.25) 326,110.986 325.536,111.45 D4.2@325.2,111.45 ; R9.2 R21.1 314.5,82.66 314.5,97 315.635,98.135 D3.2 321.385,98.135 322.655,99.405 D3.8 329.447,99.405 329.792,99.75 v1(330,99.75) ; v2(323.6,111.4) 323.65,111.45 D4.2@324.975,111.45 ; 54.293,82.5 C19.1 ; C19.1 64.88,86.88 65.793,87.793 72.207,87.793 77,83 88.507,83 89.257,82.25 96,82.25
  Top Layer w1.5: R21.1@315.006,82.654 322.494,82.654 R9.2
  Bottom Layer w0.254: v1(96.25,67) 106.101,67 109.578,70.477 112.961,73.86 112.961,73.936 113.25,74.225 113.25,79.979 112.5,80.729 v1(112.5,86.5) ; v1(129.5,106.515) 138.759,106.515 139.744,107.5 C11.1 ; v1(129.5,109.388) 129.5,112.351 129.649,112.5 C8.1 C5.1 ; v1(137.25,85.5) v1(137.25,89.25) ; v1(139.75,94.5) v1(139.75,98.5) ; v1(149.5,85.75) 149.5,86 145.5,90 C3.1 C2.1 C9.2 C13.1 C17.1 C4.1 C7.1 C10.2 C12.1 C14.1 140,31.75 141.25,30.5 164.351,30.5 164.5,30.649 v1(164.5,49.75) ; v1(155.5,85.75) 155.5,80.149 155.649,80 v1(167.25,80) ; v1(155.5,97.5) 168.5,97.5 v1(170.25,99.25) ; v1(208.5,29) 208.5,33 210.75,35.25 215.101,35.25 215.25,35.399 v1(215.25,41.5) ; v1(235.5,107.75) 240.75,107.75 246.75,113.75 v1(261.75,113.75) ; v1(272.75,113.75) 272.75,110.649 273.261,110.138 v1(289.638,110.138)
  Bottom Layer w0.5: v1(326,107.25) 326,105.5 330,101.5 v1(330,99.75)
  Bottom Layer w1.5: R9.2 329,89.16 341.121,89.16 342,88.281 342,74.864 341.013,73.877 340.067,73.877 X2.2
  other v2: 321.4,111.4 322.5,111.4 321.4,112.5 323.6,112.5 322.5,113.6 323.6,113.6
NetC1_2: C1.2 D2.76 R1.2 R25.2 | length 196.5
  Top Layer w0.254: D2.76 102.6,59.4 104.661,57.339 105.411,57.339 v1(105.5,57.25) ; v1(128,89.25) 127.893,89.357 127.893,91.112 133.893,97.112 142.757,97.112 147.443,101.798 147.443,102.323 C1.2 149.25,100.87 v1(149.25,96) ; v1(228.25,109.75) 228.5,109.5 v1(228.5,100.5)
  Bottom Layer w0.254: v1(105.5,57.25) 108.75,57.25 120.75,69.25 120.75,80.25 128,87.5 v1(128,89.25) ; v1(149.25,96) 182.539,96 187.039,100.5 v1(228.5,100.5) ; R25.2 R1.2 227.34,110.66 v1(228.25,109.75)
NetC2_2: C2.2 D2.90 R5.2 R26.2 | length 109.4
  Top Layer w0.254: D2.90 106.28,81 106.362,80.917 106.968,80.917 107.102,80.784 113.784,80.784 116.911,83.911 116.911,84.911 v1(117,85) ; v1(131.25,92) 135,95.75 141,95.75 145.75,91 145.75,86.87 C2.2
  Bottom Layer w0.254: v1(117,85) 117,91.851 117.149,92 v1(131.25,92) ; C2.2 147.62,82.38 151.5,78.5 174,78.5 180.5,85 R5.2 R26.2
NetC3_2: C3.2 D2.91 R3.2 R23.2 | length 99.4
  Top Layer w0.254: D2.91 106.28,81.5 106.509,81.271 107.115,81.271 107.248,81.138 110.884,81.138 111.638,81.892 v1(111.638,82) ; v1(111.5,74.25) 111.5,72.899 111.649,72.75 150.851,72.75 151.25,73.149 v1(151.25,81) 151.375,81.125 162.125,81.125 v1(162.25,81.25)
  Bottom Layer w0.254: v1(111.5,74.25) 111.625,74.375 111.625,81.987 v1(111.638,82) ; C3.2 151.25,86.37 v1(151.25,81) ; v1(162.25,81.25) 163.67,81.25 R3.2 R23.2
NetC4_2: C4.2 D2.94 R6.2 R27.2 | length 103.6
  Top Layer w0.254: D2.94 106.281,83 106.643,83.362 109.534,83.362 109.784,83.112 112.675,83.112 113.537,82.25 v1(113.75,82.25) ; v1(115,89.5) 119.031,89.5 120.281,88.25 v1(144,88.25) ; C4.2 R27.2 R6.2
  Bottom Layer w0.254: v1(113.75,82.25) 113.75,86.041 115,87.291 v1(115,89.5) ; v1(144,88.25) 144,63.62 C4.2
NetC5_2: C5.2 D2.93 R4.2 R28.2 | length 124.3
  Top Layer w0.254: D2.93 v1(107.5,82.5) ; v1(107.25,90) 107.25,90.25 118,101 v1(118,101.25) ; v1(160.75,101.75) 160.944,101.944 160.944,102.351 161,102.407 v1(161,109) ; v1(179.25,113.5) 180.75,115 R4.2 ; v1(182.25,117.75) 182.295,117.795 182.295,119.955 R28.2
  Bottom Layer w0.254: v1(107.25,90) 107.444,89.806 107.444,89.281 107.5,89.225 v1(107.5,82.5) ; v1(118,101.25) 160.25,101.25 v1(160.75,101.75) ; C5.2 152.5,117.5 v1(161,109) 165.25,109 169.75,113.5 v1(179.25,113.5) ; v1(182.25,117.75) 182.295,117.705 182.295,115.045 R4.2
NetC6_2: C6.2 D2.92 R2.2 R29.2 | length 104.2
  Top Layer w0.254: D2.92 106.281,82 106.643,81.638 108.425,81.638 109.037,82.25 v1(109.25,82.25) ; v1(109,89.25) 126.75,107 v1(126.75,109.388) ; C6.2 164.92,122.5 R2.2
  Bottom Layer w0.254: v1(109,89.25) 109.125,89.125 109.125,82.375 v1(109.25,82.25) ; v1(126.75,109.388) 126.75,124.351 126.899,124.5 145.62,124.5 C6.2 ; R29.2 R2.2
NetC7_2: C7.2 D2.88 R7.2 R24.2 | length 104.8
  Top Layer w0.254: D2.88 106.705,80 106.756,79.949 115.289,79.949 115.84,80.5 v1(117,80.5) ; v1(118.25,70) 118.25,68.25 121.75,64.75 126.5,64.75 134.75,56.5 146.12,56.5 C7.2
  Bottom Layer w0.254: v1(117,80.5) 117.194,80.306 117.944,80.306 118.25,80 v1(118.25,70) ; C7.2 147.62,56.601 147.769,56.75 180.59,56.75 R7.2 R24.2
NetC8_2: C8.2 D2.86 R10.2 R31.2 | length 124.6
  Top Layer w0.254: D2.86 118.5,79 120,80.5 v1(120,82.75) ; v1(121.75,90.25) 132.25,100.75 v1(132.25,109.388) ; C8.2 194.84,112.5 R10.2
  Bottom Layer w0.254: v1(120,82.75) 121.75,84.5 v1(121.75,90.25) ; v1(132.25,109.388) 135.328,109.388 135.66,109.72 138.462,109.72 138.682,109.5 144.62,109.5 C8.2 ; R10.2 R31.2
NetC9_1: C9.1 D2.87 R11.2 R30.2 | length 114.1
  Top Layer w0.254: D2.87 118.101,79.5 118.25,79.649 118.25,83.997 118.399,84.146 131.286,84.146 132.682,82.75 144.87,82.75 C9.1
  Bottom Layer w0.254: C9.1 149.87,77.75 197.247,77.75 197.396,77.899 197.396,84.944 R11.2 R30.2
NetC10_1: C10.1 D2.84 R14.1 R33.1 | length 132
  Top Layer w0.254: D2.84 121.25,78 v1(122,78.75) ; v1(136,52) 145.62,52 C10.1
  Bottom Layer w0.254: v1(122,78.75) 122.016,78.766 122.016,79.766 123,80.75 130.5,80.75 136,75.25 v1(136,52) ; C10.1 150.12,47.5 154.25,47.5 159,52.25 194.59,52.25 R14.1 R33.1
NetC11_2: C11.2 D2.85 R13.1 R32.1 | length 152
  Top Layer w0.254: D2.85 119,78.5 122.25,81.75 v1(127.25,81.75) ; C11.2 153.25,107.5 153.5,107.25 153.5,106 ; v1(153.5,91.5) 153.5,106 ; v1(159.25,106) 153.5,106 ; v1(163.75,106) 163.812,106.062 169.562,106.062 v1(169.625,106.125) ; v1(188.75,106) 189.75,107 197,107 v1(212.25,107)
  Bottom Layer w0.254: v1(127.25,81.75) 127.25,84.5 134.25,91.5 v1(153.5,91.5) ; v1(159.25,106) v1(163.75,106) ; v1(169.625,106.125) 188.625,106.125 v1(188.75,106) ; v1(212.25,107) 212.335,107.085 212.335,114.915 R13.1 R32.1
NetC12_2: C12.2 D2.83 R16.2 R34.2 | length 155.5
  Top Layer w0.254: D2.83 123.25,77.5 v1(124,78.25) ; v1(124.25,62.25) 124.25,49.75 129,45 137.5,45 138.75,46.25 146.37,46.25 C12.2 154.87,52.25 170.351,52.25 170.5,52.399 170.5,57.351 170.649,57.5 209.84,57.5 R16.2 R34.2
  Bottom Layer w0.254: v1(124,78.25) 124.125,78.125 124.125,62.375 v1(124.25,62.25)
NetC13_2: C13.2 D2.82 R17.2 R35.2 | length 135.1
  Top Layer w0.254: D2.82 145.62,77 C13.2
  Bottom Layer w0.254: C13.2 148,75 148,74.876 148.057,74.819 148.181,74.819 154.75,68.25 212.25,68.25 212.295,68.295 212.295,84.955 R17.2 R35.2
NetC14_2: C14.2 D2.78 R19.1 R36.1 | length 181.5
  Top Layer w0.254: D2.78 109.75,75 110.25,74.5 110.25,41.5 115.25,36.5 139.557,36.5 143.057,40 C14.2 148.37,39.25 225.601,39.25 226.736,40.385 226.736,54.086 227.34,54.69 R19.1
  Bottom Layer w0.254: R19.1 R36.1
NetC15_1: C15.1 D4.7 D4.8 X5.1 | length 28.2
  Top Layer w0.254: D4.8 324.633,114.975 ; D4.7 324.9,114 324.75,114.15 324.75,114.858 324.633,114.975 ; v1(326,115.5) 325.792,115.5 325.267,114.975 324.633,114.975
  Top Layer w0.5: v1(329.973,103.69) 336.515,103.69 339.025,106.2 X5.1
  Bottom Layer w0.5: v1(326,115.5) 327.5,114 327.5,106 329.81,103.69 v1(329.973,103.69)
NetC15_2: C15.2 C16.2 X5.5 | length 19.7
  Top Layer w0.5: C16.2 C15.2 337.115,111.31 339.025,109.4 X5.5
NetC16_1: C16.1 D2.10 D2.31 D2.61 D2.80 D2.98 D2.100 D3.3 D4.5 D4.6 D5.20 Q10.1 R20.1 R23.1 R24.1 R25.1 R26.1 R27.1 R28.1 R29.1 R30.1 R31.1 R32.2 R33.2 R34.1 R35.1 R36.2 R37.2 SW1.B X1.1 X3.7 X4.4 | length 891.1
  Top Layer w0.254: R20.1 77.744,107.42 78.164,107 X4.4 88.3,99.55 86.25,97.5 77.043,97.5 76.75,97.207 76.75,87.25 80.5,83.5 83.25,83.5 ; v1@83.25,88.101 83.25,83.5 ; D2.31@86.6,83.5 83.25,83.5 ; D2.10 96.5,90.5 v1(98.5,92.5) ; v1(162.5,113.75) 169.26,113.75 170.51,115 R29.1 ; v1(163.75,110.25) 162.5,109 162.5,104.58 R23.1 ; X3.7 252.75,83.75 252.75,101.601 252.899,101.75 300.603,101.75 300.607,101.754 301.479,101.754 301.975,102.25 ; D4.5 D4.6 327.5,113.5
  Top Layer w0.5: X1.1 41.9,98 42.15,98.25 42.15,107.107 42.443,107.4 v1(65.6,107.4) ; Q10.1 92.5,52.915 94,54.415 D2.61 94,74 96.293,76.293 101.2,76.293 ; D2.80 101.493,76 101.2,76.293 ; D2.100 104.5,86 105.5,87 ; v1(103.25,92.5) 106.72,89.03 106.72,88.22 105.5,87 ; D2.98@103.404,85 D2.98 101.493,85 101.2,84.707 101.2,76.293 ; R27.1 177.58,65.207 177.873,65.5 191.707,65.5 192.5,64.707 R24.1 ; R23.1 177.58,88.08 176.25,86.75 166.5,86.75 163.5,83.75 ; R26.1 192.5,93.207 192.207,93.5 ; R30.1 207.5,93.083 ; R35.1 222.5,93.957 222.207,94.25 ; R37.2 233.25,94.25 222.207,94.25 ; D5.20 300.12,104.575 300.195,104.5 300.195,104.03 301.975,102.25 332.25,102.25 344.5,90 344.5,66.25 SW1.B 335,63.142 326.25,71.892 326.25,87.5 322,91.75 322,96.572 321.707,96.865 D3.3 316.615,96.865 v1(316.25,96.5) ; v1(321.5,103.857) 328.709,103.857 329.002,104.15 v1(329.002,108.498) ; 327.5,113.5 327.5,115 ; C16.1 327.5,115 ; v1(329.002,114.998) 329,115 327.5,115 ; 105.5,87 109.225,87 109.724,87.5 142.75,87.5 146.5,83.75 163.5,83.75 ; 163.5,83.75 170.5,83.75 172.313,85.563 176.313,85.563 180,89.25 180,92 181.5,93.5 192.207,93.5 ; 192.207,93.5 207.083,93.5 207.5,93.083 ; 207.5,93.083 207.5,93.957 207.793,94.25 222.207,94.25
  Bottom Layer w0.254: v1(83.25,88.399) 83.25,90.101 83.399,90.25 95,90.25 97.25,92.5 v1(98.5,92.5) v1(103.25,92.5) ; v1(162.5,113.75) 162.5,111 163.25,110.25 v1(163.75,110.25) ; R29.1 177.58,115.142 176.5,116.222 176.5,118.851 176.649,119 191.5,119 R28.1 195.5,123 207.351,123 207.5,122.851 R31.1 209.5,120 211.5,122 222.25,122 222.58,121.67 ; R32.2 222.58,121.67 ; R36.2 240.101,60 240.25,60.149 240.25,71.25 X3.7 247.5,80 R37.2 ; R25.1 237.5,122.851 237.351,123 222.729,123 222.58,122.851 222.58,121.67
  Bottom Layer w0.5: v1(65.6,107.4) 65.61,107.41 77.49,107.41 R20.1 ; R24.1 195.25,62.75 206.957,62.75 207.5,62.207 R33.2 210.5,63 222.207,63 222.5,62.707 R34.1 226,63.5 237.207,63.5 237.5,63.207 R36.2 ; R26.1 192.672,90.172 193.172,90.172 194.05,91.05 206.45,91.05 R30.1 ; v1(316.25,96.5) 316.25,98.607 v1(321.5,103.857) ; v1(329.002,108.498) v1(329.002,114.998)
NetC17_2: C17.2 D2.77 R22.1 R37.1 | length 180.8
  Top Layer w0.254: D2.77 107.601,74.5 107.75,74.351 v1(107.75,50.25) ; v1(133.5,64.25) 141.87,64.25 C17.2
  Bottom Layer w0.254: v1(107.75,50.25) 119.5,50.25 v1(133.5,64.25) ; C17.2 152.62,65 221.601,65 227.34,70.739 R22.1 R37.1
NetC18_1: C18.1 D2.34 V1.1 | length 16.8
  Top Layer w0.254: C18.1 76.55,77.5 V1.1 81.45,78.45 85,82 D2.34
NetC19_2: C19.2 D2.33 V1.2 | length 15.7
  Top Layer w0.254: C19.2 76.55,82.5 V1.2 81.66,81.55 82.61,82.5 D2.33
NetC20_2: C20.2 D5.9 V2.1 | length 16.7
  Top Layer w0.5: D5.9 309.525,109.775 309.992,110.242 309.992,114.992 C20.2
  Bottom Layer w0.5: C20.2 311.95,113.05 V2.1
NetC21_2: C21.2 D5.8 V2.2 | length 18.8
  Top Layer w0.5: D5.8 309.875,109.125 312.25,106.75 314.757,106.75 315.05,107.043 V2.2
  Bottom Layer w0.5: C21.2 315.025,114.975 315.025,108.775 V2.2
NetD1_1: D1.1 R8.2 R9.1 | length 28.9
  Top Layer w1.5: D1.1 325.04,52.21 R8.2
  Bottom Layer w1.5: R9.1 322.5,55.67 R8.2
NetD1_2: D1.2 D1.4 R8.1 SW1.A | length 38.6
  Top Layer w1.5: D1.2 322.5,59.83 R8.1
  Bottom Layer w1.5: R8.1 327.621,62.83 328.5,61.951 328.5,52.629 329.379,51.75 SW1.A
NetD1_3: D1.3 R18.2 X2.1 | length 66.5
  Top Layer w1.5: R18.2 315,50.66 319.96,45.7 D1.3 D1.3@319.96,43.5
  Bottom Layer w1.5: R18.2 318.371,52.5 319.25,53.379 319.25,76.621 320.129,77.5 333.871,77.5 334.75,76.621 334.75,70.879 335.629,70 X2.1
NetD2_2: D2.2 D4.25 | length 239.1
  Top Layer w0.254: D2.2 100.5,96.75 103.25,99.5 v1(103.25,99.612)
  Top Layer w0.5: D4.25 322.5,108.708 323.25,107.958 v1(323.25,107.75)
  Bottom Layer w0.5: v1(103.25,99.612) 103.362,99.612 108.665,104.915 251.415,104.915 254.103,107.603 323.103,107.603 v1(323.25,107.75)
NetD2_3: D2.3 D4.24 | length 237.4
  Top Layer w0.254: v1(98.25,90.5) 98.423,90.327 99.266,90.327 100,89.593 D2.3 ; v1(321,106.5) 322,107.5 D4.24
  Bottom Layer w0.254: v1(98.25,90.5) 98.407,90.5 98.907,91 110,91 112.042,93.042 129.052,93.042 129.583,93.573 182.073,93.573 187.25,98.75 293,98.75 300.75,106.5 v1(321,106.5)
NetD2_12: D2.12 X1.2 | length 65.2
  Top Layer w0.254: X1.2 v1(65.5,96) ; v1(95.25,96) 95.25,95.725 95.5,95.475 D2.12
  Bottom Layer w0.254: v1(65.5,96) 68.146,93.354 92.604,93.354 v1(95.25,96)
NetD2_13: D2.13 X1.3 | length 60.9
  Top Layer w0.254: X1.3 v1(65.5,94) ; v1(94.14,93.36) 94.14,93.203 95,92.343 D2.13
  Bottom Layer w0.254: v1(65.5,94) 67,92.5 93.843,92.5 93.946,92.603 93.946,93.165 v1(94.14,93.36)
NetD2_19: D2.19 D5.18 | length 217.4
  Top Layer w0.254: D2.19 92,90.851 92.316,91.168 92.806,91.168 v1(93,91.362) ; v1(292.75,104.612) 292.862,104.612 294.125,105.875 D5.18
  Bottom Layer w0.254: v1(93,91.362) 93.194,91.168 94.168,91.168 101.75,98.75 120.623,98.75 121.623,99.75 165.5,99.75 169.5,103.75 292,103.75 292.75,104.5 v1(292.75,104.612)
NetD2_20: D2.20 D5.14 X4.2 | length 238.1
  Top Layer w0.254: D2.20 91.5,94 93.984,96.484 93.984,97.484 v1(94,97.5)
  Top Layer w0.5: v1(292.75,108.735) 292.958,108.735 293.218,108.475 D5.14@299.05,108.475
  Bottom Layer w0.5: X4.2 X4.2@92.865,112.135 ; v1(94,97.5) 94.147,97.647 94.147,98.1 94.75,98.703 94.75,110.25 X4.2@92.865,112.135 ; v1(292.75,108.735) 245.263,108.735 242.278,105.75 192.342,105.75 190.592,107.5 148.964,107.5 148.014,108.45 139.606,108.45 138.656,107.5 99.26,107.5 94.625,112.135 X4.2@92.865,112.135
NetD2_21: D2.21 D5.16 X4.5 | length 242.8
  Top Layer w0.254: D2.21 91,95.249 92.5,96.749 X4.5 95.75,110.25 151.25,110.25 152.5,111.5 279.843,111.5 280.343,111 v1(280.5,111) ; D5.16 299.668,107.193 300.443,107.193 301.791,108.541 302.533,108.541 v1(302.727,108.735)
  Bottom Layer w0.254: v1(280.5,111) 280.5,112.75 281.25,113.5 302.578,113.5 302.727,113.351 v1(302.727,108.735)
NetD2_22: D2.22 D5.17 X4.1 | length 277
  Top Layer w0.254: v1(72,98.75) 72,112.351 72.149,112.5 X4.1 88.3,116.401 88.449,116.55 277.95,116.55 287.975,106.525 D5.17 ; v1(88.25,95) 90.5,92.75 D2.22
  Bottom Layer w0.254: v1(72,98.75) 72,96.25 73.25,95 v1(88.25,95)
NetD2_30: D2.30 D4.9 X4.3 | length 273.5
  Top Layer w0.254: D2.30 85.149,84 85,84.149 85,94.469 90.5,99.969 90.5,108.5 92,110 94.2,110 X4.3 122.255,112.5 123.505,111.25 151,111.25 151.75,112 275,112 v1(276.5,113.5) ; v1(322.75,120.75) 323.5,120 D4.9
  Bottom Layer w0.254: v1(276.5,113.5) 283.75,120.75 v1(322.75,120.75)
NetD2_89: D2.89 R18.1 R21.2 | length 281.9
  Top Layer w0.381: D2.89 106.795,80.5 106.929,80.367 115.117,80.367 v1(117,82.25)
  Top Layer w1.5: R18.1 R21.2
  Bottom Layer w0.381: v1(117,82.25) 117.241,82.25 117.991,81.5 120.5,81.5 124,85 124,88.25 126.5,90.75 131.75,90.75 133.5,92.5 243.75,92.5 254.25,82 254.25,50.25 255,49.5 302.5,49.5 305.5,52.5 305.5,63 R21.2
NetD2_95: D2.95 R12.1 | length 57.2
  Top Layer w0.254: D2.95 106.28,83.5 106.496,83.716 110.047,83.716 110.125,83.638 113.675,83.638 114.537,84.499 v1(114.747,84.499)
  Top Layer w0.5: R12.1 v1(102.5,57)
  Bottom Layer w0.5: v1(102.5,57) 115,69.5 115,83.822 114.894,83.927 114.894,84.352 v1(114.747,84.499)
NetD2_96: D2.96 X3.3 | length 226.2
  Top Layer w0.254: D2.96 106.28,84 106.426,84.146 108.392,84.146 108.746,84.5 v1(111.25,84.5) ; v1(109,71.5) 109.896,70.604 109.896,38.854 115,33.75 225,33.75 230.75,39.5 230.75,56.75 241.918,67.918 245.418,67.918 v1(245.5,68)
  Bottom Layer w0.254: v1(109,71.5) 110.25,72.75 110.25,82.25 111.25,83.25 v1(111.25,84.5) ; v1(245.5,68) 245.5,74.351 245.649,74.5 X3.3
NetD2_97: D2.97 X3.1 | length 155.8
  Top Layer w0.254: D2.97 108.245,84.5 109.107,85.362 114.39,85.362 114.89,85.862 120.638,85.862 121.75,84.75 136.031,84.75 136.927,83.854 144.896,83.854 146.338,82.412 245.79,82.412 245.939,82.263 245.939,74.061 X3.1
NetD3_1: D3.1 D5.1 | length 18.1
  Top Layer w0.5: D5.1 305.875,104.575 306.95,103.5 v1(314,103.5) ; v1(315.75,99.5) 317.581,99.5 317.676,99.405 D3.1
  Bottom Layer w0.5: v1(314,103.5) 315.75,101.75 v1(315.75,99.5)
NetD3_4: D3.4 D5.2 | length 50.7
  Top Layer w0.5: D5.2 305.362,105.238 313.988,105.238 v1(314,105.25) ; v1(317.5,91) 317.5,95.302 317.793,95.595 D3.4
  Bottom Layer w0.5: v1(314,105.25) 318.803,105.25 318.926,105.127 323.373,105.127 328.25,100.25 328.25,93 326.25,91 v1(317.5,91)
NetD3_6: D3.6 X2.4 | length 22.1
  Top Layer w0.5: D3.6 325.849,96.865 332.806,89.908 332.806,88.624 X2.4
NetD3_7: D3.7 R15.1 | length 19.7
  Top Layer w0.5: D3.7 324.253,98.135 323,96.882 323,94.25 330,87.25 R15.1
NetD4_3: D4.3 X5.3 | length 16.9
  Top Layer w0.254: D4.3 327,112 331.2,107.8 X5.3
NetD4_4: D4.4 X5.2 | length 19.3
  Top Layer w0.254: D4.4 328.5,112.5 v1(331.75,109.25) ; v1(336,106.25) 336.75,107 X5.2
  Bottom Layer w0.254: v1(331.75,109.25) 331.75,107.25 332.75,106.25 v1(336,106.25)
NetD5_19: D5.19 R20.2 | length 239.1
  Top Layer w0.254: v1(269.5,109.75) 276.25,103 296.75,103 298.975,105.225 D5.19
  Bottom Layer w0.254: R20.2 77.5,123.101 80.149,125.75 253.5,125.75 v1(269.5,109.75)
NetLS1_1: LS1.1 Q10.3 | length 17.4
  Top Layer w0.5: LS1.1 Q10.3
NetQ1_B1: Q1.B1 Q1.B2 R1.1 | length 19
  Top Layer w0.254: Q1.B1 Q1.B2 v1(240.75,110)
  Bottom Layer w0.254: R1.1 240,115 240.75,114.25 v1(240.75,110)
NetQ2_B1: Q2.B1 Q2.B2 R2.1 | length 24.4
  Top Layer w0.254: Q2.B1 177.5,102.175 180.5,105.175 v1(180.5,109.25) 178.25,109.25 178.148,109.352 178.023,109.352 177.5,109.875 Q2.B2 ; R2.1 177.58,118.116 177.946,117.75 v1(178,117.75)
  Bottom Layer w0.254: v1(178,117.75) 179,117.75 180.5,116.25 v1(180.5,109.25)
NetQ3_B1: Q3.B1 Q3.B2 R3.1 | length 37.8
  Top Layer w0.254: Q3.B1 Q3.B2 v1(183.548,80.048) ; R3.1 177.799,85.219 178.379,85.219 v1(180.33,87.17)
  Bottom Layer w0.254: v1(180.33,87.17) 180.33,91.351 180.479,91.5 184.25,91.5 184.5,91.25 184.5,81 v1(183.548,80.048)
NetQ4_B1: Q4.B1 Q4.B2 R6.1 | length 13
  Top Layer w0.254: Q4.B1 177.58,42.13 R6.1
NetQ5_B1: Q5.B1 Q5.B2 R4.1 | length 28.4
  Top Layer w0.254: Q5.B1 192.5,102.175 191.977,102.698 191.852,102.698 190.8,103.75 186.75,103.75 186,104.5 186,107.851 186.149,108 190.5,108 191.852,109.352 191.977,109.352 192.5,109.875 Q5.B2 v1(195,110) ; R4.1 v1(195,115)
  Bottom Layer w0.254: v1(195,110) v1(195,115)
NetQ6_B1: Q6.B1 Q6.B2 R5.1 | length 18.1
  Top Layer w0.254: Q6.B1 192.5,79.5 192.75,79.75 v1(195.25,79.75)
  Bottom Layer w0.254: R5.1 194.851,85 195,84.851 195,80 v1(195.25,79.75)
NetQ7_B1: Q7.B1 Q7.B2 R7.1 | length 13
  Top Layer w0.254: Q7.B1 Q7.B2 R7.1
NetQ8_B1: Q8.B1 Q8.B2 R10.1 | length 44.7
  Top Layer w0.254: Q8.B1 213.601,102.05 213.75,102.199 213.75,107.851 213.601,108 200.899,108 200.75,108.149 200.75,110.853 200.899,111.002 206.623,111.002 207.5,110.125 Q8.B2 v1(210.75,110)
  Bottom Layer w0.254: R10.1 210.75,111.75 v1(210.75,110)
NetQ9_B1: Q9.B1 Q9.B2 R11.1 | length 18.3
  Top Layer w0.254: Q9.B1 Q9.B2 v1(210.5,80)
  Bottom Layer w0.254: R11.1 209.351,85 210.5,83.851 v1(210.5,80)
NetQ10_2: Q10.2 R12.2 | length 14.5
  Top Layer w0.5: Q10.2 91.23,34.5 94.23,31.5 99,31.5 R12.2
NetQ11_B1: Q11.B1 Q11.B2 R14.2 | length 13
  Top Layer w0.254: Q11.B1 Q11.B2 R14.2
NetQ12_B1: Q12.B1 Q12.B2 R13.2 | length 18.6
  Top Layer w0.254: Q12.B1 Q12.B2 v1(225.5,110)
  Bottom Layer w0.254: R13.2 225.101,115 225.5,114.601 v1(225.5,110)
NetQ13_B1: Q13.B1 R17.1 | length 15.2
  Top Layer w0.254: Q13.B1 222.5,72.175 225.25,74.925 v1(225.25,80)
  Bottom Layer w0.254: R17.1 225.25,82.25 v1(225.25,80)
NetQ14_B1: Q14.B1 Q14.B2 R16.1 | length 13
  Top Layer w0.254: Q14.B1 Q14.B2 R16.1
NetQ15_B1: Q15.B1 Q15.B2 R19.2 | length 13
  Top Layer w0.254: Q15.B1 Q15.B2 R19.2
NetQ16_B1: Q16.B1 Q16.B2 R22.2 | length 18.5
  Top Layer w0.254: Q16.B1 Q16.B2 241,80 v1(241.75,80.75)
  Bottom Layer w0.254: R22.2 v1(241.75,80.75)
NetR15_2: R15.2 X2.3 | length 12.1
  Top Layer w1.5: R15.2 334.88,72.5 X2.3
pads on no net: D2.1 D2.4 D2.5 D2.6 D2.7 D2.8 D2.9 D2.14 D2.15 D2.16 D2.17 D2.18 D2.23 D2.24 D2.25 D2.26 D2.27 D2.28 D2.29 D2.35 D2.36 D2.37 D2.38 D2.39 D2.40 D2.41 D2.42 D2.43 D2.44 D2.45 D2.46 D2.47 D2.48 D2.49 D2.50 D2.51 D2.52 D2.53 D2.54 D2.55 D2.56 D2.57 D2.58 D2.59 D2.60 D2.63 D2.64 D2.65 D2.66 D2.67 D2.68 D2.69 D2.70 D2.71 D2.72 D2.73 D2.74 D2.75 D2.79 D3.5 D4.1 D4.10 D4.11 D4.12 D4.13 D4.14 D4.15 D4.16 D4.17 D4.18 D4.19 D4.20 D4.21 D4.22 D4.23 D4.26 D4.27 D4.28 D5.3 D5.4 D5.5 D5.6 D5.7 D5.11 D5.12 D5.13 D5.15 Q13.B2 X1.MP1 X1.MP2 X3.2 X3.4 X3.6 X3.8 X4. X5.4 X5.6 X5.7 X5.8 X5.9 X5.X X5.Y
copper on no net:
  other v3: 260.5,58 295.5,58 260.5,93 295.5,93
  other v4: 278,75.5